# EAGLE board 04B-340-A1-01 (EAGLE 9.6.2)
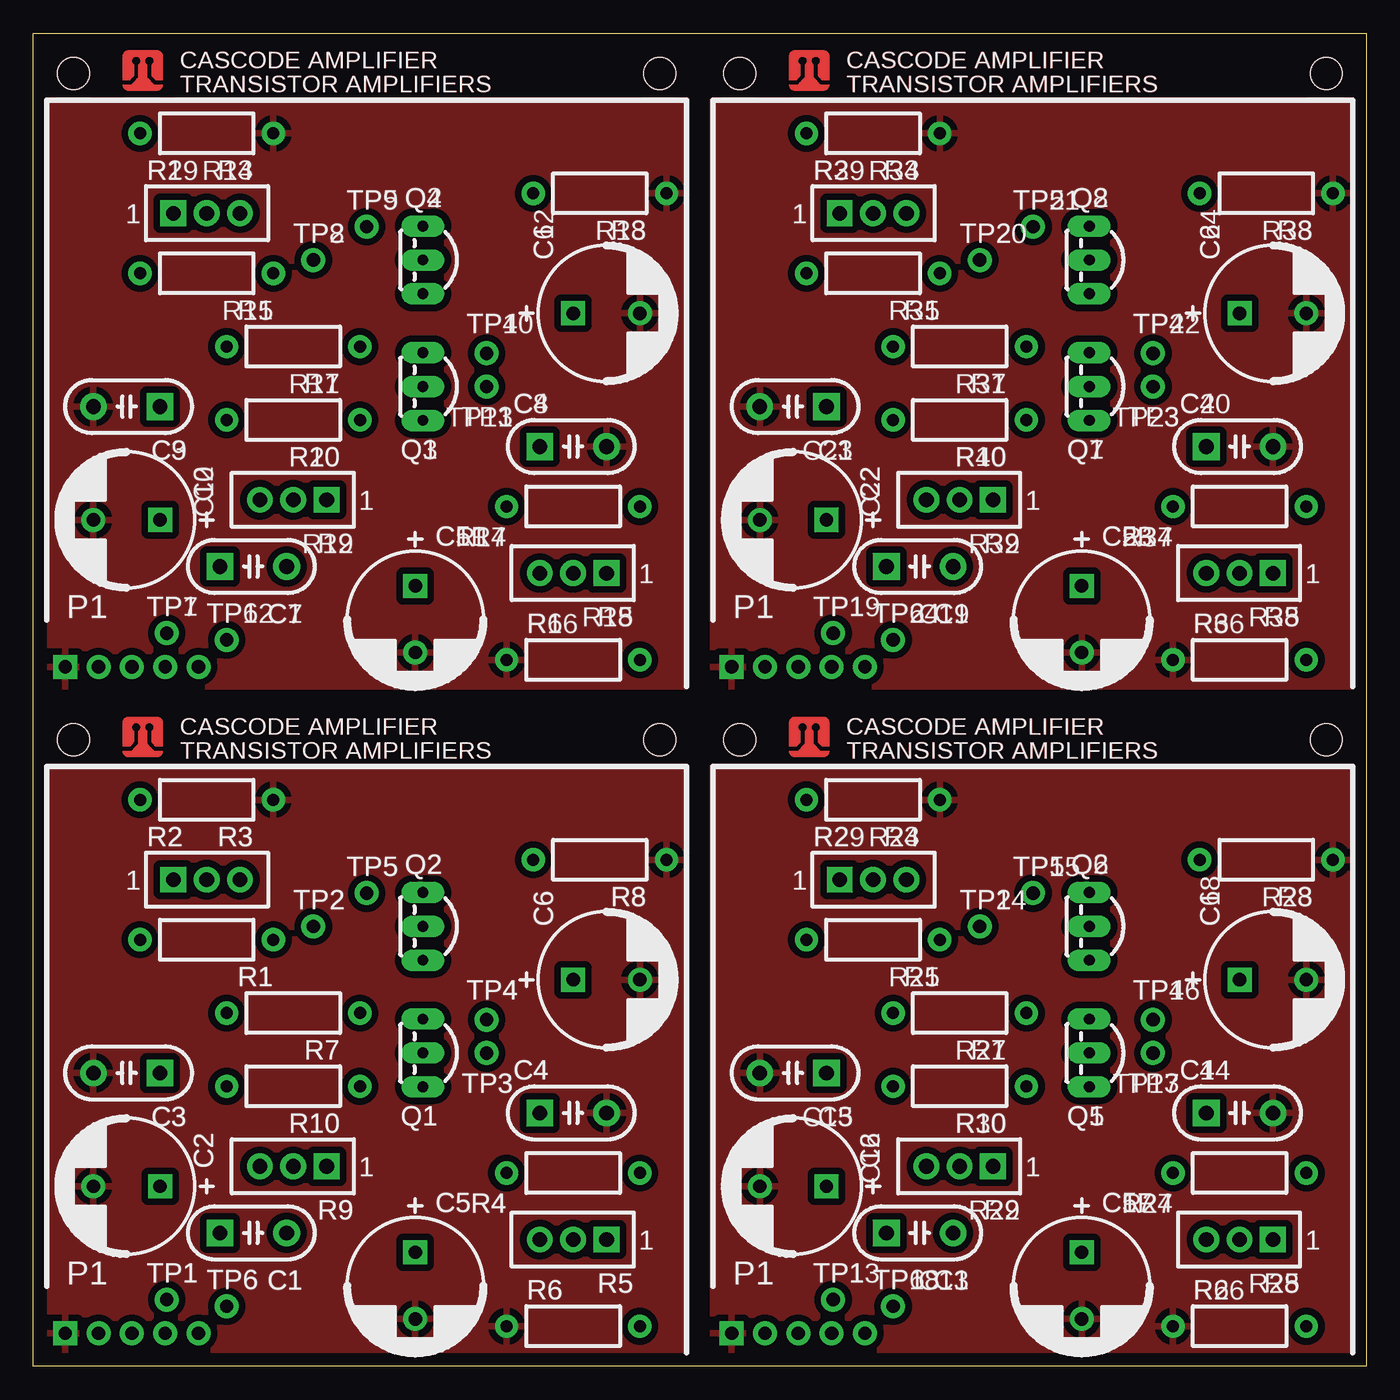
[diagram p0: board, top side]
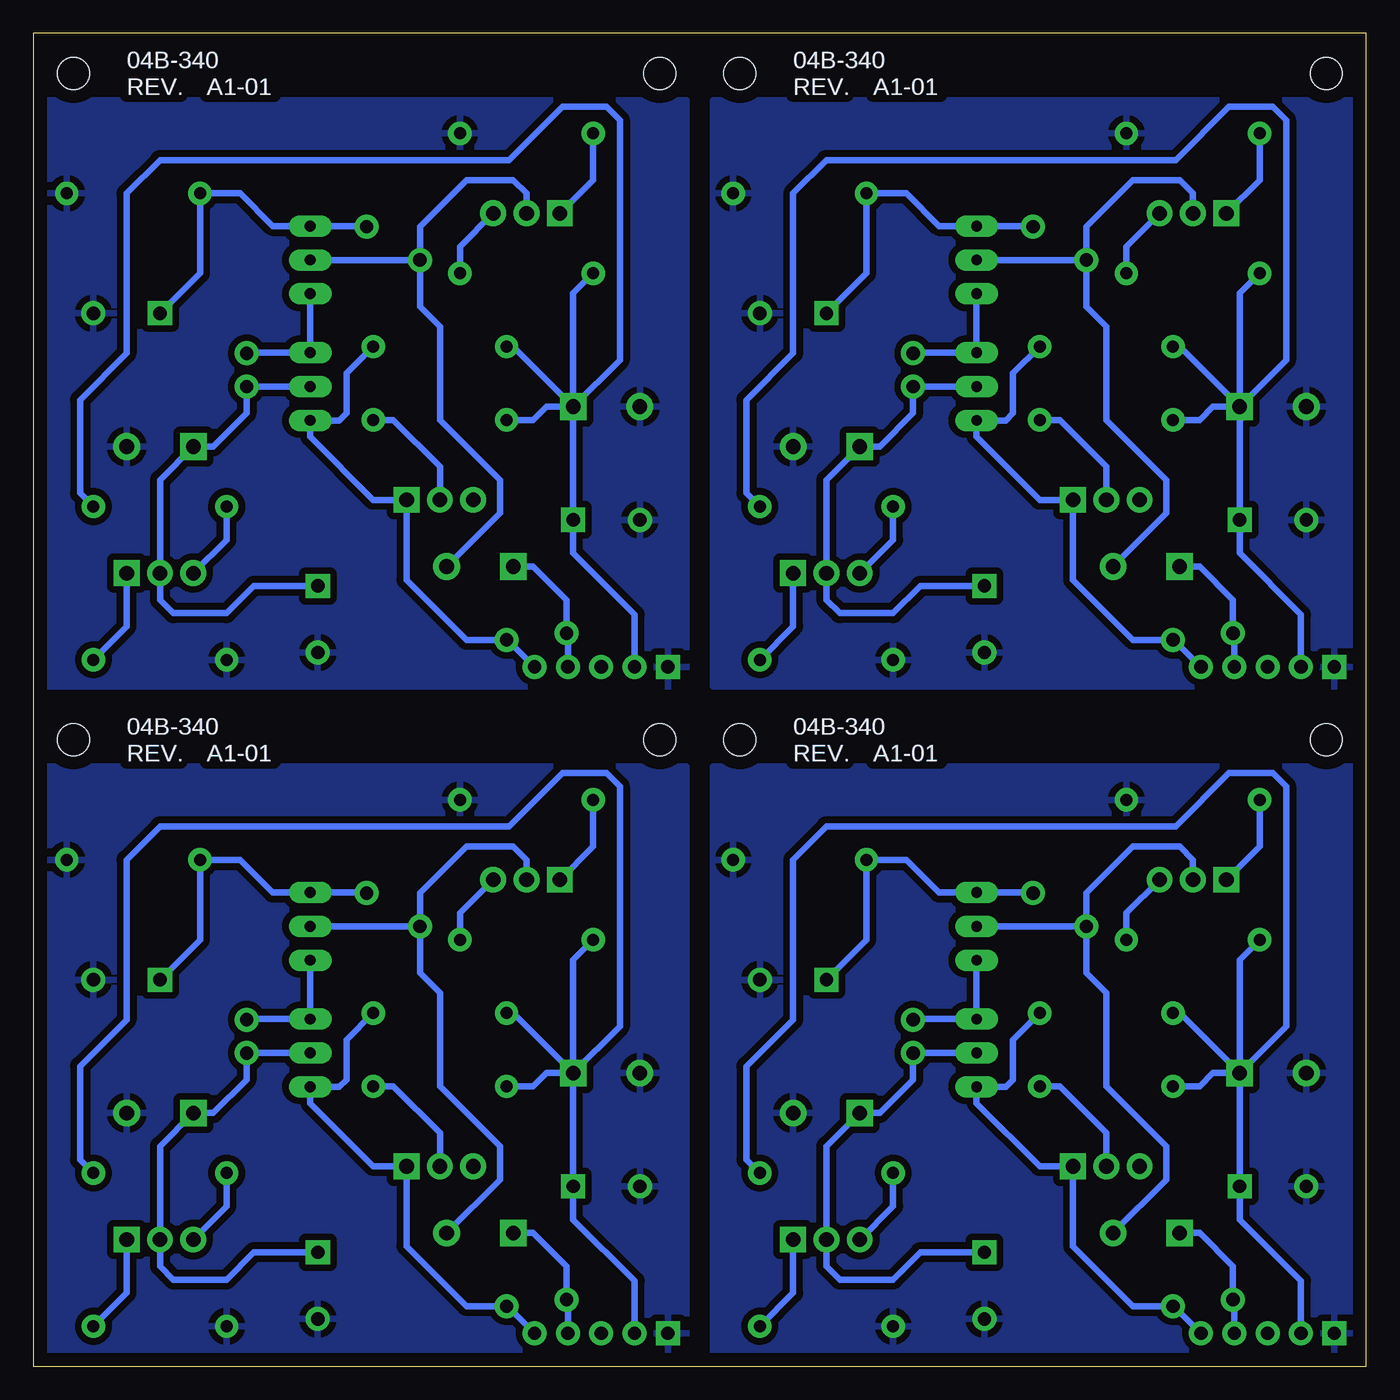
[diagram p1: board, bottom side, seen from below]

Size 100 x 100 mm. Coordinates in mm from the lower left corner, seen from the top.
Outline: 0,0 0,100 100,100 100,0 0,0
Copper layers (1*16): Top 0.035mm / dielectric 1.5mm / Bottom 0.035mm
Design rules "minipcb-THD": minimum track width 0.5mm, minimum drill 0.5mm, track to track 0.5mm, track to pad 0.5mm, pad to pad 0.5mm, via to via 0.5mm, smd to smd 0mil, copper to edge 1mm, drill to drill 1mm, minimum pad ring 0.4mm, minimum via ring 0.4mm, stop-mask expansion 0.1mm, vias tented up to drill 0.6mm, thermal gap 0.5mm

## Footprints (pad centres in the part's own frame; a part is rotated, then mirrored left to right if it is on the bottom)
C050-024X044 = drill 1.1 pad 2 square: 1 -2.5,0 | drill 1.1 pad 2: 2 2.5,0
C5MM = drill 1 square: + -2.5,0 | drill 1: - 2.5,0
PINS_1X5 = drill 1 square: 1 0,0 | drill 1: 2 2.5,0; 3 5,0; 4 7.5,0; 5 10,0
MINIPCB_0P_50X50MM = hole 2.4: 47,47; 3,47
TO92-EBC-OVAL = drill 0.813 long: B 0,-1.27; C 2.54,-1.27; E -2.54,-1.27
0204/10 = drill 0.9 pad 1.75: 1 -5,0; 2 5,0
TRIM_0100 = drill 1.1 pad 1.93 square: 1 0,0 | drill 1.1 pad 1.93: 2 2.5,0; 3 5,0
PINS_1_TESTPOINT_KE5000_NOTEXT = drill 1: 1 0,0

## Placement (x,y rotation side)
C1  [C050-024X044]  16.5,10 0 top
C2  [C5MM]  7,13.5 180 top
C3  [C050-024X044]  7,22 180 top
C4  [C050-024X044]  40.5,19 0 top
C5  [C5MM]  28.65,6.05 270 top
C6  [C5MM]  43,29 0 top
C7  [C050-024X044]  16.5,60 0 top
C8  [C050-024X044]  40.5,69 0 top
C9  [C050-024X044]  7,72 180 top
C10  [C5MM]  7,63.5 180 top
C11  [C5MM]  28.65,56.05 270 top
C12  [C5MM]  43,79 0 top
C13  [C050-024X044]  66.5,10 0 top
C14  [C050-024X044]  90.5,19 0 top
C15  [C050-024X044]  57,22 180 top
C16  [C5MM]  57,13.5 180 top
C17  [C5MM]  78.65,6.05 270 top
C18  [C5MM]  93,29 0 top
C19  [C050-024X044]  66.5,60 0 top
C20  [C050-024X044]  90.5,69 0 top
C21  [C050-024X044]  57,72 180 top
C22  [C5MM]  57,63.5 180 top
C23  [C5MM]  78.65,56.05 270 top
C24  [C5MM]  93,79 0 top
P1  [PINS_1X5]  2.39,2.47 0 top
P2  [PINS_1X5]  2.39,52.47 0 top
P3  [PINS_1X5]  52.39,2.47 0 top
P4  [PINS_1X5]  52.39,52.47 0 top
PCB1  [MINIPCB_0P_50X50MM]  0,0 0 top
PCB2  [MINIPCB_0P_50X50MM]  0,50 0 top
PCB3  [MINIPCB_0P_50X50MM]  50,0 0 top
PCB4  [MINIPCB_0P_50X50MM]  50,50 0 top
Q1  NPN  [TO92-EBC-OVAL]  30.5,23.5 270 top
Q2  NPN  [TO92-EBC-OVAL]  30.5,33 270 top
Q3  NPN  [TO92-EBC-OVAL]  30.5,73.5 270 top
Q4  NPN  [TO92-EBC-OVAL]  30.5,83 270 top
Q5  NPN  [TO92-EBC-OVAL]  80.5,23.5 270 top
Q6  NPN  [TO92-EBC-OVAL]  80.5,33 270 top
Q7  NPN  [TO92-EBC-OVAL]  80.5,73.5 270 top
Q8  NPN  [TO92-EBC-OVAL]  80.5,83 270 top
R1  [0204/10]  13,32 180 top
R2  [TRIM_0100]  10.5,36.5 0 top
R3  [0204/10]  13,42.5 180 top
R4  [0204/10]  40.5,14.5 0 top
R5  [TRIM_0100]  43,9.5 180 top
R6  [0204/10]  40.5,3 0 top
R7  [0204/10]  19.5,26.5 180 top
R8  [0204/10]  42.5,38 180 top
R9  [TRIM_0100]  22,15 180 top
R10  [0204/10]  19.5,21 180 top
R11  [0204/10]  19.5,76.5 180 top
R12  [TRIM_0100]  22,65 180 top
R13  [0204/10]  42.5,88 180 top
R14  [0204/10]  13,92.5 180 top
R15  [0204/10]  13,82 180 top
R16  [0204/10]  40.5,53 0 top
R17  [0204/10]  40.5,64.5 0 top
R18  [TRIM_0100]  43,59.5 180 top
R19  [TRIM_0100]  10.5,86.5 0 top
R20  [0204/10]  19.5,71 180 top
R21  [0204/10]  69.5,26.5 180 top
R22  [TRIM_0100]  72,15 180 top
R23  [0204/10]  92.5,38 180 top
R24  [0204/10]  63,42.5 180 top
R25  [0204/10]  63,32 180 top
R26  [0204/10]  90.5,3 0 top
R27  [0204/10]  90.5,14.5 0 top
R28  [TRIM_0100]  93,9.5 180 top
R29  [TRIM_0100]  60.5,36.5 0 top
R30  [0204/10]  69.5,21 180 top
R31  [0204/10]  69.5,76.5 180 top
R32  [TRIM_0100]  72,65 180 top
R33  [0204/10]  92.5,88 180 top
R34  [0204/10]  63,92.5 180 top
R35  [0204/10]  63,82 180 top
R36  [0204/10]  90.5,53 0 top
R37  [0204/10]  90.5,64.5 0 top
R38  [TRIM_0100]  93,59.5 180 top
R39  [TRIM_0100]  60.5,86.5 0 top
R40  [0204/10]  69.5,71 180 top
TP1  [PINS_1_TESTPOINT_KE5000_NOTEXT]  10,5 0 top
TP2  [PINS_1_TESTPOINT_KE5000_NOTEXT]  21,33 0 top
TP3  [PINS_1_TESTPOINT_KE5000_NOTEXT]  34,23.5 270 top
TP4  [PINS_1_TESTPOINT_KE5000_NOTEXT]  34,26 0 top
TP5  [PINS_1_TESTPOINT_KE5000_NOTEXT]  25,35.5 0 top
TP6  [PINS_1_TESTPOINT_KE5000_NOTEXT]  14.5,4.5 0 top
TP7  [PINS_1_TESTPOINT_KE5000_NOTEXT]  10,55 0 top
TP8  [PINS_1_TESTPOINT_KE5000_NOTEXT]  21,83 0 top
TP9  [PINS_1_TESTPOINT_KE5000_NOTEXT]  25,85.5 0 top
TP10  [PINS_1_TESTPOINT_KE5000_NOTEXT]  34,76 0 top
TP11  [PINS_1_TESTPOINT_KE5000_NOTEXT]  34,73.5 270 top
TP12  [PINS_1_TESTPOINT_KE5000_NOTEXT]  14.5,54.5 0 top
TP13  [PINS_1_TESTPOINT_KE5000_NOTEXT]  60,5 0 top
TP14  [PINS_1_TESTPOINT_KE5000_NOTEXT]  71,33 0 top
TP15  [PINS_1_TESTPOINT_KE5000_NOTEXT]  75,35.5 0 top
TP16  [PINS_1_TESTPOINT_KE5000_NOTEXT]  84,26 0 top
TP17  [PINS_1_TESTPOINT_KE5000_NOTEXT]  84,23.5 270 top
TP18  [PINS_1_TESTPOINT_KE5000_NOTEXT]  64.5,4.5 0 top
TP19  [PINS_1_TESTPOINT_KE5000_NOTEXT]  60,55 0 top
TP20  [PINS_1_TESTPOINT_KE5000_NOTEXT]  71,83 0 top
TP21  [PINS_1_TESTPOINT_KE5000_NOTEXT]  75,85.5 0 top
TP22  [PINS_1_TESTPOINT_KE5000_NOTEXT]  84,76 0 top
TP23  [PINS_1_TESTPOINT_KE5000_NOTEXT]  84,73.5 270 top
TP24  [PINS_1_TESTPOINT_KE5000_NOTEXT]  64.5,54.5 0 top

## Library data of the parts
C1-C24 P1-P4 Q1-Q8 R1-R40 TP1-TP24 = minipcb
PCB1-PCB4 = minipcb; CIRCUIT_CATEGORY: TRANSISTOR AMPLIFIERS; PART_NUMBER: 04B-340; REVISION: A1-01; TITLE: CASCODE AMPLIFIER

## Nets
GND: C2.- C3.2 C4.2 C5.- C6.- P1.1 R3.1 R6.1 R8.1
GND1: C8.2 C9.2 C10.- C11.- C12.- P2.1 R13.1 R14.1 R16.1
GND2: C14.2 C15.2 C16.- C17.- C18.- P3.1 R23.1 R24.1 R26.1
GND3: C20.2 C21.2 C22.- C23.- C24.- P4.1 R33.1 R34.1 R36.1
N$1: R2.1 R3.2
N$2: C1.2 Q2.B R2.2 TP2.1
N$3: C4.1 C5.+ Q1.B R5.2 TP3.1
N$4: R1.1 R2.3
N$5: R4.1 R5.3
N$6: R5.1 R6.2
N$7: C1.1 P1.4 TP1.1
N$8: Q1.E Q2.C TP4.1
N$9: P1.5 Q1.C R7.1 R9.1 TP6.1
N$10: C6.+ Q2.E R8.2 TP5.1
N$11: R9.2 R10.1
N$12: R14.2 R19.1
N$13: C7.2 Q4.B R19.2 TP8.1
N$14: C8.1 C11.+ Q3.B R18.2 TP11.1
N$15: R15.1 R19.3
N$16: R17.1 R18.3
N$17: R16.2 R18.1
N$18: C7.1 P2.4 TP7.1
N$19: Q3.E Q4.C TP10.1
N$20: P2.5 Q3.C R11.1 R12.1 TP12.1
N$21: C12.+ Q4.E R13.2 TP9.1
N$22: R12.2 R20.1
N$23: R24.2 R29.1
N$24: C13.2 Q6.B R29.2 TP14.1
N$25: C14.1 C17.+ Q5.B R28.2 TP17.1
N$26: R25.1 R29.3
N$27: R27.1 R28.3
N$28: R26.2 R28.1
N$29: C13.1 P3.4 TP13.1
N$30: Q5.E Q6.C TP16.1
N$31: P3.5 Q5.C R21.1 R22.1 TP18.1
N$32: C18.+ Q6.E R23.2 TP15.1
N$33: R22.2 R30.1
N$34: R34.2 R39.1
N$35: C19.2 Q8.B R39.2 TP20.1
N$36: C20.1 C23.+ Q7.B R38.2 TP23.1
N$37: R35.1 R39.3
N$38: R37.1 R38.3
N$39: R36.2 R38.1
N$40: C19.1 P4.4 TP19.1
N$41: Q7.E Q8.C TP22.1
N$42: P4.5 Q7.C R31.1 R32.1 TP24.1
N$43: C24.+ Q8.E R33.2 TP21.1
N$44: R32.2 R40.1
V+: C2.+ C3.1 P1.2 R1.2 R4.2 R7.2 R10.2
V+1: C9.1 C10.+ P2.2 R11.2 R15.2 R17.2 R20.2
V+2: C15.1 C16.+ P3.2 R21.2 R25.2 R27.2 R30.2
V+3: C21.1 C22.+ P4.2 R31.2 R35.2 R37.2 R40.2

## Tracks (layer width: path | path; a pad name or v marks a point on that pad's centre or on a via)
GND
  pour Top: 1,1 49,1 49,45 1,45
  pour Bottom: 1,1 49,1 49,45 1,45
GND1
  pour Top: 1,51 49,51 49,95 1,95
  pour Bottom: 1,51 49,51 49,95 1,95
GND2
  pour Top: 51,1 99,1 99,45 51,45
  pour Bottom: 51,1 99,1 99,45 51,45
GND3
  pour Top: 51,51 99,51 99,95 51,95
  pour Bottom: 51,51 99,51 99,95 51,95
N$1
  Bottom 0.5: R2.1 8,39 R3.2
N$2
  Bottom 0.5: R2.2 13,38 14,39 17.5,39 21,35.5 TP2.1 | TP2.1 Q2.B | C1.2 15,14 15,16.5 19.5,21 19.5,28 21,29.5 TP2.1
N$3
  Bottom 0.5: Q1.B TP3.1 34,21.5 36.5,19 C4.1 40.5,16.5 R5.2 40.5,7.5 39.5,6.5 35.5,6.5 33.45,8.55 C5.+
N$4
  Bottom 0.5: R1.1 18,34 R2.3
N$5
  Bottom 0.5: R5.3 35.5,12 R4.1
N$6
  Bottom 0.5: R6.2 43,5.5 R5.1
N$7
  Bottom 0.5: P1.4 9.89,4.89 TP1.1 10,7.5 12.5,10 C1.1
N$8
  Bottom 0.5: Q2.C Q1.E 33.96,26.04 TP4.1
N$9
  Bottom 0.5: P1.5 14.42,4.5 TP6.1 17.5,4.5 22,9 R9.1 24.5,15 29.23,19.73 Q1.C 27.04,20.96 26.5,21.5 26.5,24.5 R7.1
N$10
  Bottom 0.5: TP5.1 25.04,35.54 Q2.E 32.04,35.54 34.5,38 R8.2 37.5,32 C6.+
N$11
  Bottom 0.5: R9.2 19.5,17.5 23,21 R10.1
N$12
  Bottom 0.5: R19.1 8,89 R14.2
N$13
  Bottom 0.5: R19.2 13,88 14,89 17.5,89 21,85.5 TP8.1 | TP8.1 Q4.B | C7.2 15,64 15,66.5 19.5,71 19.5,78 21,79.5 TP8.1
N$14
  Bottom 0.5: Q3.B TP11.1 34,71.5 36.5,69 C8.1 40.5,66.5 R18.2 40.5,57.5 39.5,56.5 35.5,56.5 33.45,58.55 C11.+
N$15
  Bottom 0.5: R15.1 18,84 R19.3
N$16
  Bottom 0.5: R18.3 35.5,62 R17.1
N$17
  Bottom 0.5: R16.2 43,55.5 R18.1
N$18
  Bottom 0.5: P2.4 9.89,54.89 TP7.1 10,57.5 12.5,60 C7.1
N$19
  Bottom 0.5: Q4.C Q3.E 33.96,76.04 TP10.1
N$20
  Bottom 0.5: P2.5 14.42,54.5 TP12.1 17.5,54.5 22,59 R12.1 24.5,65 29.23,69.73 Q3.C 27.04,70.96 26.5,71.5 26.5,74.5 R11.1
N$21
  Bottom 0.5: TP9.1 25.04,85.54 Q4.E 32.04,85.54 34.5,88 R13.2 37.5,82 C12.+
N$22
  Bottom 0.5: R12.2 19.5,67.5 23,71 R20.1
N$23
  Bottom 0.5: R29.1 58,39 R24.2
N$24
  Bottom 0.5: R29.2 63,38 64,39 67.5,39 71,35.5 TP14.1 | TP14.1 Q6.B | C13.2 65,14 65,16.5 69.5,21 69.5,28 71,29.5 TP14.1
N$25
  Bottom 0.5: Q5.B TP17.1 84,21.5 86.5,19 C14.1 90.5,16.5 R28.2 90.5,7.5 89.5,6.5 85.5,6.5 83.45,8.55 C17.+
N$26
  Bottom 0.5: R25.1 68,34 R29.3
N$27
  Bottom 0.5: R28.3 85.5,12 R27.1
N$28
  Bottom 0.5: R26.2 93,5.5 R28.1
N$29
  Bottom 0.5: P3.4 59.89,4.89 TP13.1 60,7.5 62.5,10 C13.1
N$30
  Bottom 0.5: Q6.C Q5.E 83.96,26.04 TP16.1
N$31
  Bottom 0.5: P3.5 64.42,4.5 TP18.1 67.5,4.5 72,9 R22.1 74.5,15 79.23,19.73 Q5.C 77.04,20.96 76.5,21.5 76.5,24.5 R21.1
N$32
  Bottom 0.5: TP15.1 75.04,35.54 Q6.E 82.04,35.54 84.5,38 R23.2 87.5,32 C18.+
N$33
  Bottom 0.5: R22.2 69.5,17.5 73,21 R30.1
N$34
  Bottom 0.5: R39.1 58,89 R34.2
N$35
  Bottom 0.5: R39.2 63,88 64,89 67.5,89 71,85.5 TP20.1 | TP20.1 Q8.B | C19.2 65,64 65,66.5 69.5,71 69.5,78 71,79.5 TP20.1
N$36
  Bottom 0.5: Q7.B TP23.1 84,71.5 86.5,69 C20.1 90.5,66.5 R38.2 90.5,57.5 89.5,56.5 85.5,56.5 83.45,58.55 C23.+
N$37
  Bottom 0.5: R35.1 68,84 R39.3
N$38
  Bottom 0.5: R38.3 85.5,62 R37.1
N$39
  Bottom 0.5: R36.2 93,55.5 R38.1
N$40
  Bottom 0.5: P4.4 59.89,54.89 TP19.1 60,57.5 62.5,60 C19.1
N$41
  Bottom 0.5: Q8.C Q7.E 83.96,76.04 TP22.1
N$42
  Bottom 0.5: P4.5 64.42,54.5 TP24.1 67.5,54.5 72,59 R32.1 74.5,65 79.23,69.73 Q7.C 77.04,70.96 76.5,71.5 76.5,74.5 R31.1
N$43
  Bottom 0.5: TP21.1 75.04,85.54 Q8.E 82.04,85.54 84.5,88 R33.2 87.5,82 C24.+
N$44
  Bottom 0.5: R32.2 69.5,67.5 73,71 R40.1
V+
  Bottom 0.5: P1.2 4.89,6.39 9.5,11 C2.+ C3.1 | C3.1 11.5,22 12.5,21 R10.2 | R7.2 14,26.5 C3.1 | C3.1 9.5,30.5 R1.2 | R4.2 46.5,15.5 46.5,22.5 43,26 43,38 40.5,40.5 14.3,40.5 10.3,44.5 7,44.5 6,43.5 6,25.5 C3.1
V+1
  Bottom 0.5: P2.2 4.89,56.39 9.5,61 C10.+ C9.1 | C9.1 11.5,72 12.5,71 R20.2 | R11.2 14,76.5 C9.1 | C9.1 9.5,80.5 R15.2 | R17.2 46.5,65.5 46.5,72.5 43,76 43,88 40.5,90.5 14.3,90.5 10.3,94.5 7,94.5 6,93.5 6,75.5 C9.1
V+2
  Bottom 0.5: P3.2 54.89,6.39 59.5,11 C16.+ C15.1 | C15.1 61.5,22 62.5,21 R30.2 | R21.2 64,26.5 C15.1 | C15.1 59.5,30.5 R25.2 | R27.2 96.5,15.5 96.5,22.5 93,26 93,38 90.5,40.5 64.3,40.5 60.3,44.5 57,44.5 56,43.5 56,25.5 C15.1
V+3
  Bottom 0.5: P4.2 54.89,56.39 59.5,61 C22.+ C21.1 | C21.1 61.5,72 62.5,71 R40.2 | R31.2 64,76.5 C21.1 | C21.1 59.5,80.5 R35.2 | R37.2 96.5,65.5 96.5,72.5 93,76 93,88 90.5,90.5 64.3,90.5 60.3,94.5 57,94.5 56,93.5 56,75.5 C21.1

## Text on the board
_tNames: R3 | R3 | R2 | R2 | TP5 | Q2 | TP5 | Q2 | R8 | R8 | TP2 | TP2 | C6 | C6 | R1 | R1 | TP4 | TP4 | R7 | R7 | C4 | TP3 | C4 | TP3 | C3 | Q1 | C3 | Q1 | R10 | R10 | C2 | C2 | R4 | R4 | R9 | C5 | R9 | C5 | C1 | R5 | C1 | R5 | TP1 | TP6 | TP1 | TP6 | R6 | R6 | R3 | R3 | R2 | R2 | TP5 | Q2 | TP5 | Q2 | R8 | R8 | TP2 | TP2 | C6 | C6 | R1 | R1 | TP4 | TP4 | R7 | R7 | C4 | TP3 | C4 | TP3 | C3 | Q1 | C3 | Q1 | R10 | R10 | C2 | C2 | R4 | R4 | R9 | C5 | R9 | C5 | C1 | R5 | C1 | R5 | TP1 | TP6 | TP1 | TP6 | R6 | R6